# EAGLE board BMS.job (EAGLE 6.2)
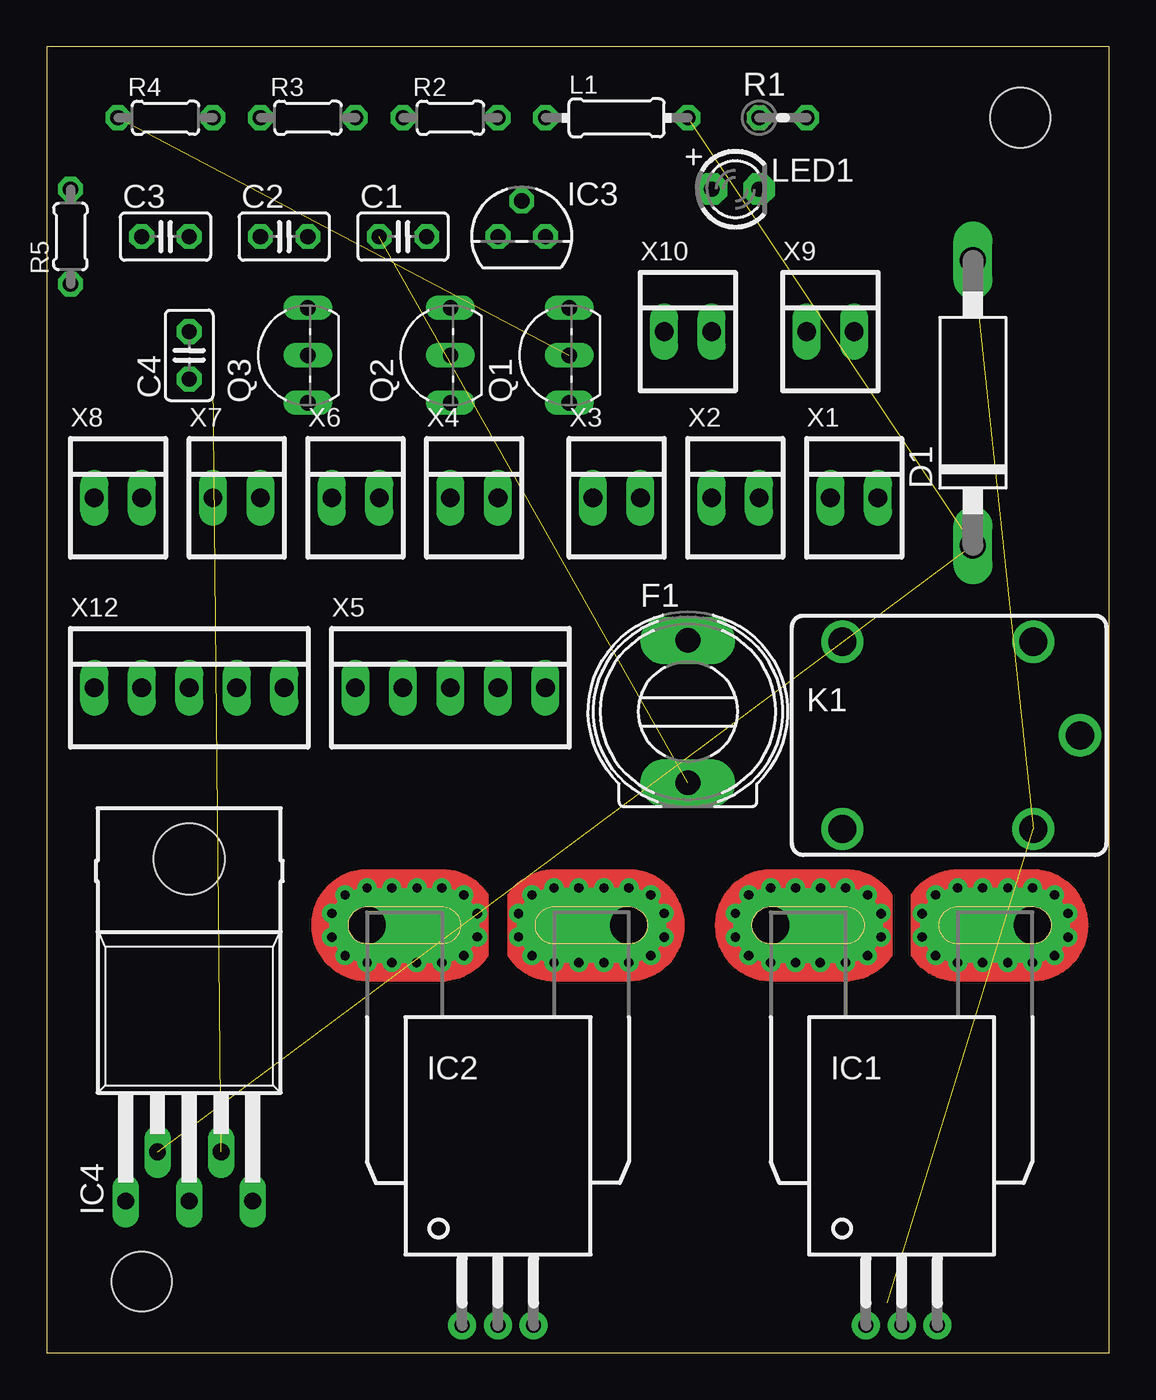
[diagram p0: board, top side]
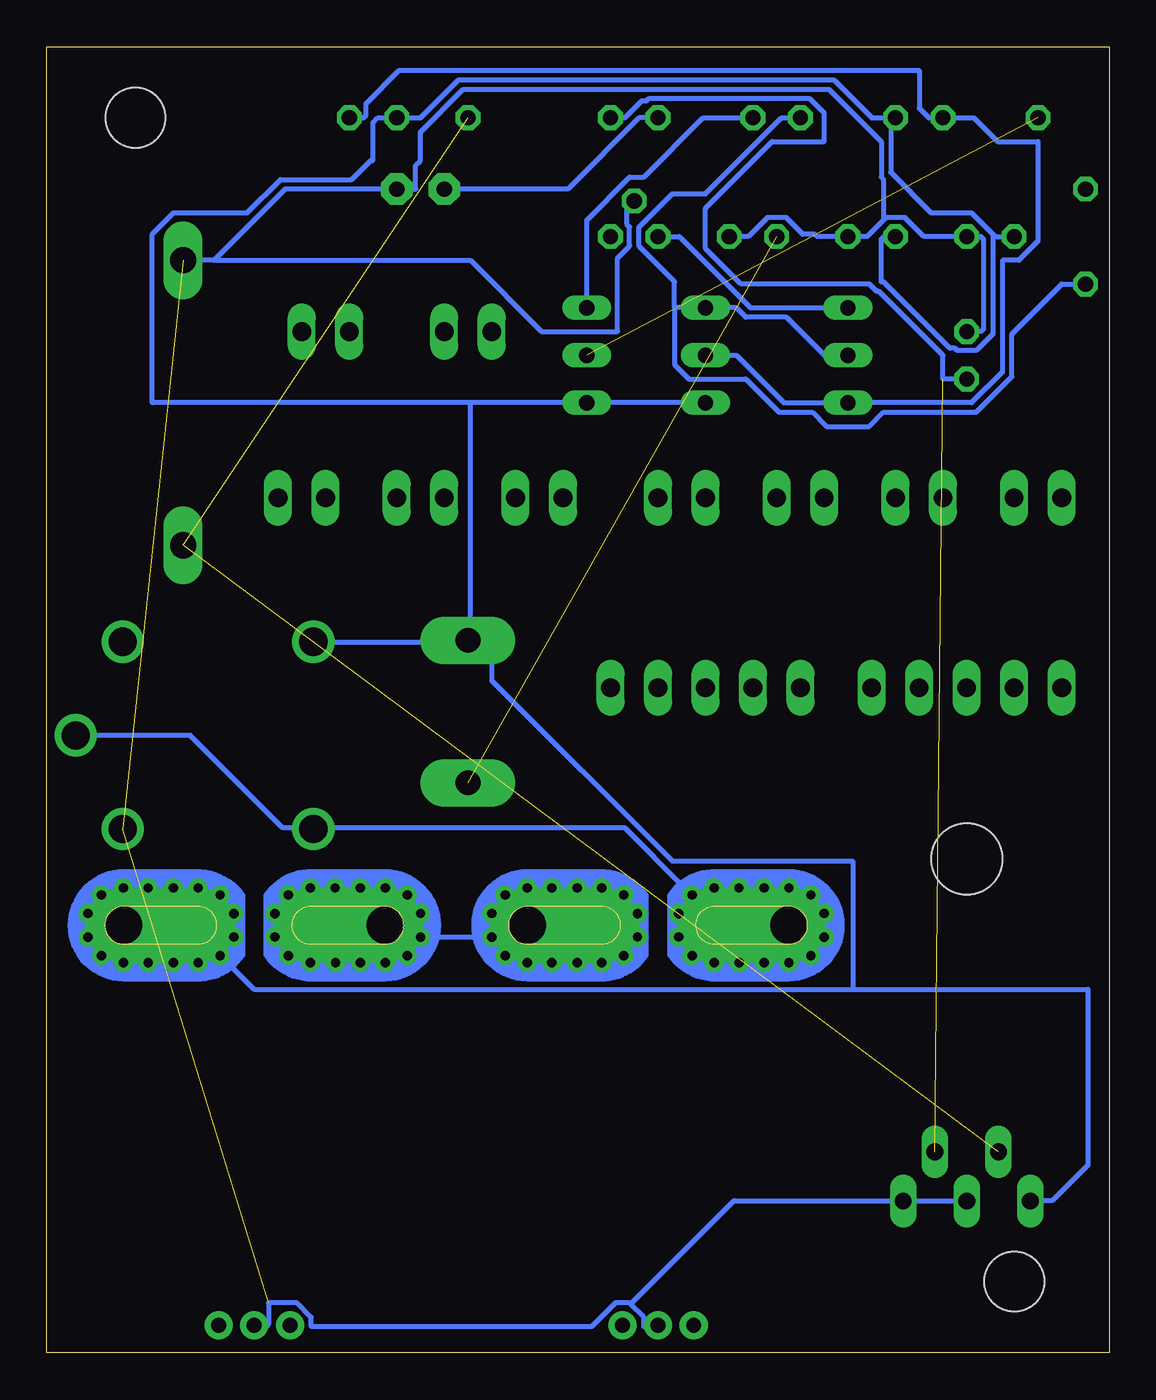
[diagram p1: board, bottom side, seen from below]

Size 56.82 x 69.84 mm. Coordinates in mm from the lower left corner, seen from the top.
Outline: 0,0 56.82,0 56.82,69.84 0,69.84 0,0
Copper layers (1*16): Top 0.035mm / dielectric 1.5mm / Bottom 0.035mm
Design rules: minimum track width 10mil, minimum drill 24mil, track to track 8mil, track to pad 8mil, pad to pad 8mil, via to via 8mil, smd to smd 8mil, copper to edge 40mil, drill to drill 8mil, minimum pad ring 10mil, minimum via ring 8mil, stop-mask expansion 4mil, vias tented up to drill 0mil, thermal gap 10mil
Holes 3.2 mm at 5.08,3.81 52.07,66.04

## Footprints (pad centres in the part's own frame; a part is rotated, then mirrored left to right if it is on the bottom)
C025-025X050 = drill 0.813 octagon: 1 -1.27,0; 2 1.27,0
C1702-15 = drill 1.397 long: A 7.62,0; C -7.62,0
KS9V = drill 1.321 pad 2.54 long: 1 0,3.81; 2 0,-3.81
ACS75050 = drill 0.8 pad 1.5: 1 -1.91,-21.4; 2 0,-21.4; 3 1.91,-21.4 | drill 2 pad 4 offset: IP+ 7,0; IP- -7,0 | drill 0.5 pad 0.9: IP+@2 8.89,-0.635; IP+@3 8.89,0.635; IP+@4 8.175,1.625; IP+@5 7,2; IP+@6 5.675,2; IP+@7 4.325,2; IP+@8 3,2; IP+@9 1.825,1.625; IP+@10 1.1,0.625; IP+@11 1.1,-0.625; IP+@12 1.825,-1.625; IP+@13 3,-2; IP+@14 4.325,-2; IP+@15 5.675,-2; IP+@16 7,-2; IP+@17 8.175,-1.625; IP-@2 -8.89,-0.635; IP-@3 -8.89,0.635; IP-@4 -8.175,1.625; IP-@5 -7,2; IP-@6 -5.675,2; IP-@7 -4.325,2; IP-@8 -3,2; IP-@9 -1.825,1.625; IP-@10 -1.1,0.625; IP-@11 -1.1,-0.625; IP-@12 -1.825,-1.625; IP-@13 -3,-2; IP-@14 -4.35,-2; IP-@15 -5.675,-2; IP-@16 -7,-2; IP-@17 -8.175,-1.625
TO92 = drill 0.813 octagon: 1 -1.27,0; 2 0,1.905; 3 1.27,0
TO220-52 = drill 0.9 long: 1 -3.4,-21.1; 2 -1.7,-18.47; 3 0,-21.1; 4 1.7,-18.47; 5 3.4,-21.1 | hole 3.8: 0,-2.8
CQ1 = drill 1.5: 1 4.5,-5; 2 4.5,5; C 7,0; NC -5.7,-5; NO -5.7,5
0204/7 = drill 0.813 octagon: 1 -3.81,0; 2 3.81,0
LED3MM = drill 0.813 pad 1.676 octagon: A -1.27,0; K 1.27,0
TO92-EBC-OVAL = drill 0.813 long: B 0,-1.27; C 2.54,-1.27; E -2.54,-1.27
0204V = drill 0.813 octagon: 1 -1.27,0; 2 1.27,0
0204/5 = drill 0.813 octagon: 1 -2.54,0; 2 2.54,0
22-23-2021 = drill 1 long: 1 -1.27,0; 2 1.27,0
22-23-2051 = drill 1 long: 1 -5.08,0; 2 -2.54,0; 3 0,0; 4 2.54,0; 5 5.08,0

## Placement (x,y rotation side)
C1  [C025-025X050]  19.05,59.69 0 top
C2  [C025-025X050]  12.7,59.69 0 top
C3  [C025-025X050]  6.35,59.69 0 top
C4  [C025-025X050]  7.62,53.34 90 top
D1  [C1702-15]  49.53,50.8 90 top
F1  [KS9V]  34.29,34.29 0 top
IC1  ACS750LCA-050  [ACS75050]  45.72,22.86 0 top
IC2  ACS750LCA-050  [ACS75050]  24.13,22.86 0 top
IC3  78L08Z  [TO92]  25.4,59.69 0 top
IC4  [TO220-52]  7.62,29.21 0 top
K1  CQ1-12V  [CQ1]  48.26,33.02 0 top
L1  [0204/7]  30.48,66.04 0 top
LED1  [LED3MM]  36.83,62.23 0 top
Q1  2N2907  [TO92-EBC-OVAL]  26.67,53.34 90 top
Q2  2N2907  [TO92-EBC-OVAL]  20.32,53.34 90 top
Q3  2N2907  [TO92-EBC-OVAL]  12.7,53.34 90 top
R1  [0204V]  39.37,66.04 0 top
R2  [0204/5]  21.59,66.04 0 top
R3  [0204/5]  13.97,66.04 0 top
R4  [0204/5]  6.35,66.04 0 top
R5  [0204/5]  1.27,59.69 90 top
X1  22-23-2021  [22-23-2021]  43.18,45.72 0 top
X2  22-23-2021  [22-23-2021]  36.83,45.72 0 top
X3  22-23-2021  [22-23-2021]  30.48,45.72 0 top
X4  22-23-2021  [22-23-2021]  22.86,45.72 0 top
X5  22-23-2051  [22-23-2051]  21.59,35.56 0 top
X6  22-23-2021  [22-23-2021]  16.51,45.72 0 top
X7  22-23-2021  [22-23-2021]  10.16,45.72 0 top
X8  22-23-2021  [22-23-2021]  3.81,45.72 0 top
X9  22-23-2021  [22-23-2021]  41.91,54.61 0 top
X10  22-23-2021  [22-23-2021]  34.29,54.61 0 top
X12  22-23-2051  [22-23-2051]  7.62,35.56 0 top

## Library data of the parts
C1-C4 L1 R1-R5 = rcl
D1 = diode
F1 = fuse; OC_FARNELL: unknown; OC_NEWARK: unknown
IC1 IC2 = allegro; MF: ALLEGRO MICROSYSTEMS, INC.; MPN: ACS750LCA-050; OC_FARNELL: 1457176; OC_NEWARK: 61H4464
IC3 IC4 = linear
K1 = relay; OC_FARNELL: unknown; OC_NEWARK: unknown
LED1 Q1-Q3 = adafruit
X1-X4 X6-X10 = con-molex; MF: MOLEX; MPN: 22-23-2021; OC_FARNELL: 1462926; OC_NEWARK: 25C3832
X5 X12 = con-molex; MF: MOLEX; MPN: 22-23-2051; OC_FARNELL: 1462952; OC_NEWARK: 38C9178

## Nets
+12V: IC1.IP- IC1.IP-@2 IC1.IP-@3 IC1.IP-@4 IC1.IP-@5 IC1.IP-@6 IC1.IP-@7 IC1.IP-@8 IC1.IP-@9 IC1.IP-@10 IC1.IP-@11 IC1.IP-@12 IC1.IP-@13 IC1.IP-@14 IC1.IP-@15 IC1.IP-@16 IC1.IP-@17 IC2.IP+ IC2.IP+@2 IC2.IP+@3 IC2.IP+@4 IC2.IP+@5 IC2.IP+@6 IC2.IP+@7 IC2.IP+@8 IC2.IP+@9 IC2.IP+@10 IC2.IP+@11 IC2.IP+@12 IC2.IP+@13 IC2.IP+@14 IC2.IP+@15 IC2.IP+@16 IC2.IP+@17
GND: C1.2 C2.2 C3.2 C4.2 D1.A IC1.2 IC2.2 IC3.2 IC4.3 IC4.5 K1.1 LED1.K
N$1: C2.1 C3.1 F1.1 IC1.IP+ IC1.IP+@2 IC1.IP+@3 IC1.IP+@4 IC1.IP+@5 IC1.IP+@6 IC1.IP+@7 IC1.IP+@8 IC1.IP+@9 IC1.IP+@10 IC1.IP+@11 IC1.IP+@12 IC1.IP+@13 IC1.IP+@14 IC1.IP+@15 IC1.IP+@16 IC1.IP+@17 IC4.1 K1.NO Q1.E Q2.E R1.1 R3.1
N$2: IC2.IP- IC2.IP-@2 IC2.IP-@3 IC2.IP-@4 IC2.IP-@5 IC2.IP-@6 IC2.IP-@7 IC2.IP-@8 IC2.IP-@9 IC2.IP-@10 IC2.IP-@11 IC2.IP-@12 IC2.IP-@13 IC2.IP-@14 IC2.IP-@15 IC2.IP-@16 IC2.IP-@17 K1.C K1.NC
N$3: C1.1 F1.2
N$4: K1.2
N$5: IC1.3
N$6: IC2.3
N$7: Q1.C R2.1
N$8: LED1.A R2.2
N$9: Q2.B Q3.E R1.2 R4.2
N$10: IC2.1
N$11: Q2.C Q3.B R3.2 R5.1
N$12: D1.C IC4.2 L1.2
N$13: C4.1 IC4.4 L1.1
N$14: Q1.B R4.1
N$15: IC3.1 Q3.C
N$16: IC1.1

## Tracks (layer width: path | path; a pad name or v marks a point on that pad's centre or on a via)
+12V
  Bottom 0.254: IC2.IP+ IC2.IP+@2 IC1.IP-@2 IC1.IP-
GND  (2 unrouted)
  Bottom 0.254: C4.2 6.86,54.61 6.73,54.74 6.73,59.56 6.86,59.69 C3.2 9.91,59.69 10.92,60.71 11.94,60.71 12,60.64 | 12,60.64 12.95,59.69 C2.2 15.62,59.69 15.75,59.82 16.38,59.82 17.27,60.71 18.29,60.71 19.3,59.69 C1.2 | D1.A 47.88,58.42 47.81,58.48 | 47.81,58.48 44.07,62.23 LED1.K 37.08,62.23 37.08,63.5 36.83,63.75 36.83,65.28 34.54,67.56 14.99,67.56 12.19,64.77 12.19,62.87 12.06,62.74 12.06,60.71 12,60.64 | IC3.2 25.65,61.6 25.78,61.47 25.78,60.33 25.65,60.2 25.65,59.18 26.29,58.55 26.29,54.61 30.35,54.61 34.16,58.42 47.75,58.42 47.81,58.48 | IC4.3 7.62,8.13 10.92,8.13 IC4.5 11.05,8.13 20.07,8.13 25.59,2.6 | 25.59,2.6 24.89,1.91 24.89,1.4 24.13,1.4 IC2.2 | 25.59,2.6 25.65,2.67 26.42,2.67 27.69,1.4 42.67,1.4 42.67,1.91 43.43,2.67 44.96,2.67 44.96,1.52 45.08,1.4 45.72,1.4 IC1.2
N$1
  Bottom 0.254: C3.1 6.1,59.69 6.16,59.75 | 6.16,59.75 7.37,60.96 9.52,60.96 11.68,63.12 11.68,66.04 | C2.1 12.06,59.69 12.19,59.56 12.19,57.28 12.06,57.28 8.51,53.72 8.25,53.72 8.13,53.59 7.11,53.59 6.22,54.48 6.22,59.69 6.16,59.75 | Q2.E Q1.E 34.16,50.8 | 34.16,50.8 51.18,50.8 51.18,59.82 50.04,60.96 46.1,60.96 44.32,62.74 40.51,62.74 39.5,63.75 39.37,63.75 39.37,65.79 39.12,66.04 R1.1 36.83,66.04 34.8,68.07 14.73,68.07 12.7,66.04 11.68,66.04 | 11.68,66.04 R3.1 | 13.72,19.43 45.72,19.43 47.12,20.83 48.64,20.83 IC1.IP+@13 | 13.72,19.43 1.14,19.43 1.14,10.03 3.05,8.13 4.19,8.13 IC4.1 | 13.72,19.43 13.72,26.29 23.37,26.29 33.02,35.94 33.02,38.1 34.16,38.1 | K1.NO 42.55,37.97 36.07,37.97 35.94,38.1 F1.1 34.16,38.1 | 34.16,38.1 34.16,50.8
N$2
  Bottom 0.254: IC2.IP-@8 21.21,24.89 22.73,24.89 25.91,28.07 42.55,28.07 K1.NC 42.67,28.07 44.2,28.07 49.15,33.02 K1.C
N$3  (1 unrouted)
N$7
  Bottom 0.254: R2.1 21.72,66.04 24.89,62.87 25.65,62.87 27.94,60.58 Q1.C
N$8
  Bottom 0.254: LED1.A 28.96,62.23 25.15,66.04 R2.2
N$9
  Bottom 0.254: Q2.B 19.94,53.34 17.4,50.8 Q3.E 7.37,50.8 5.71,52.45 5.71,58.42 4.83,58.42 3.81,59.44 3.81,64.77 5.97,64.77 7.24,66.04 R4.2 9.65,66.04 10.16,66.55 10.16,68.58 37.97,68.58 39.75,66.8 39.75,66.17 39.88,66.04 R1.2
N$11
  Bottom 0.254: Q3.B 15.24,53.34 17.27,55.37 19.43,55.37 19.94,55.88 Q2.C 23.24,55.88 | R5.1 2.54,57.15 5.21,54.48 5.21,52.2 7.11,50.29 12.06,50.29 12.83,49.53 15.11,49.53 15.88,50.29 17.65,50.29 19.43,52.07 22.48,52.07 23.24,52.83 23.24,55.88 | R3.2 17.53,66.04 21.59,61.98 23.37,61.98 25.15,60.2 25.15,59.18 23.24,57.28 23.24,55.88
N$12  (2 unrouted)
N$13  (1 unrouted)
  Bottom 0.254: L1.1 25.91,66.04 25.02,66.93 24.77,66.93 24.64,67.06 16,67.06 15.24,66.29 15.24,64.77 18.03,64.77 21.59,61.21 21.59,59.05 19.69,57.15 12.83,57.15 12.45,56.77 12.32,56.77 8.89,53.34 8.89,52.07 C4.1
N$14  (1 unrouted)
N$15
  Bottom 0.254: Q3.C 19.18,55.88 22.99,59.69 IC3.1